# EAGLE board main_board (EAGLE 6.4)

Size 100 x 80 mm. Coordinates in mm from the lower left corner, seen from the top.
Outline: 0,0 100,0 100,80 0,80 0,0
Copper layers (1*16): Top 0.035mm / dielectric 1.5mm / Bottom 0.035mm
Design rules "default": minimum track width 10mil, minimum drill 24mil, track to track 8mil, track to pad 8mil, pad to pad 8mil, via to via 8mil, smd to smd 8mil, copper to edge 40mil, drill to drill 8mil, minimum pad ring 10mil, minimum via ring 8mil, stop-mask expansion 4mil, vias tented up to drill 0mil, thermal gap 10mil

## Footprints (pad centres in the part's own frame; a part is rotated, then mirrored left to right if it is on the bottom)
C0603K = smd 1.05 x 1.08: 1 -0.875,0; 2 0.875,0
C1206K = smd 1.5 x 2: 1 -1.5,0; 2 1.5,0
E3,5-8 = drill 0.813 pad 1.6: + -1.778,0 | drill 0.813 pad 1.6 octagon: - 1.778,0
SOD123 = smd 1.4 x 1.4: A 1.9,0; C -1.9,0
R1206 = smd 1.6 x 1.803: 1 -1.422,0; 2 1.422,0
DIL40_0.9 = drill 1 pad 1.397 octagon: 1 -22.86,-11.43; 2 -20.32,-11.43; 3 -17.78,-11.43; 4 -15.24,-11.43; 5 -12.7,-11.43; 6 -10.16,-11.43; 7 -7.62,-11.43; 8 -5.08,-11.43; 9 -2.54,-11.43; 10 0,-11.43; 11 2.54,-11.43; 12 5.08,-11.43; 13 7.62,-11.43; 14 10.16,-11.43; 15 12.7,-11.43; 16 15.24,-11.43; 17 17.78,-11.43; 18 20.32,-11.43; 19 22.86,-11.43; 20 25.4,-11.43; 21 25.4,11.43; 22 22.86,11.43; 23 20.32,11.43; 24 17.78,11.43; 25 15.24,11.43; 26 12.7,11.43; 27 10.16,11.43; 28 7.62,11.43; 29 5.08,11.43; 30 2.54,11.43; 31 0,11.43; 32 -2.54,11.43; 33 -5.08,11.43; 34 -7.62,11.43; 35 -10.16,11.43; 36 -12.7,11.43; 37 -15.24,11.43; 38 -17.78,11.43; 39 -20.32,11.43; 40 -22.86,11.43
WAGO_2060-402 = smd 6 x 2: 1 -4,2; 2 -4,-2 | smd 3.5 x 2: B-1 5.25,2; B-2 5.25,-2
SCREWTERMINAL-3.5MM-2 = drill 1.2 pad 2.032 square: 1 0,0 | drill 1.2 pad 2.032: 2 3.5,0
CHIP-LED0603 = smd 0.8 x 0.8: A 0,-0.75; C 0,0.75
R0603 = smd 1 x 1.1: 1 -0.85,0; 2 0.85,0
SOIC-16 = smd 1.549 x 0.61: 1 -2.692,4.445; 2 -2.692,3.175; 3 -2.692,1.905; 4 -2.692,0.635; 5 -2.692,-0.635; 6 -2.692,-1.905; 7 -2.692,-3.175; 8 -2.692,-4.445; 9 2.692,-4.445; 10 2.692,-3.175; 11 2.692,-1.905; 12 2.692,-0.635; 13 2.692,0.635; 14 2.692,1.905; 15 2.692,3.175; 16 2.692,4.445
HSOP = smd 0.7 x 1.4: 1 -5.715,-6.731; 2 -4.445,-6.731; 3 -3.175,-6.731; 4 -1.905,-6.731; 5 -0.635,-6.731; 6 0.635,-6.731; 7 1.905,-6.731; 8 3.175,-6.731; 9 4.445,-6.731; 10 5.715,-6.731; 11 5.715,6.731; 12 4.445,6.731; 13 3.175,6.731; 14 1.905,6.731; 15 0.635,6.731; 16 -0.635,6.731; 17 -1.905,6.731; 18 -3.175,6.731; 19 -4.445,6.731; 20 -5.715,6.731 | smd 2.15 x 2.8: SL1 -7.239,0; SL2 7.239,0
SO08 = smd 0.61 x 2.21: 1 -1.905,-2.616; 2 -0.635,-2.616; 3 0.635,-2.616; 4 1.905,-2.616; 5 1.905,2.616; 6 0.635,2.616; 7 -0.635,2.616; 8 -1.905,2.616
SOT23-5 = smd 0.55 x 1.2: 1 -0.95,-1.3; 2 0,-1.3; 3 0.95,-1.3; 4 0.95,1.3; 5 -0.95,1.3
SOP65P640X120-24N = smd 1.473 x 0.356: 1 -2.921,3.581; 2 -2.921,2.921; 3 -2.921,2.286; 4 -2.921,1.626; 5 -2.921,0.965; 6 -2.921,0.33; 7 -2.921,-0.33; 8 -2.921,-0.965; 9 -2.921,-1.626; 10 -2.921,-2.286; 11 -2.921,-2.921; 12 -2.921,-3.581; 13 2.921,-3.581; 14 2.921,-2.921; 15 2.921,-2.286; 16 2.921,-1.626; 17 2.921,-0.965; 18 2.921,-0.33; 19 2.921,0.33; 20 2.921,0.965; 21 2.921,1.626; 22 2.921,2.286; 23 2.921,2.921; 24 2.921,3.581
MICROMATCH-4 = drill 0.813: 1 1.905,1.27; 2 0.635,-1.27; 3 -0.635,1.27; 4 -1.905,-1.27

## Placement (x,y rotation side)
C3  100nF  [C0603K]  -25.4,102.87 0 top  (outside the outline)
C5  33nF  [C0603K]  -68.58,102.87 0 top  (outside the outline)
C6  10uF  [C1206K]  -87.63,90.17 0 top  (outside the outline)
C7  470uF-16V  [E3,5-8]  94.34,65.8 0 top
C8  1uF  [C0603K]  -92.71,102.87 0 top  (outside the outline)
C10  100nF  [C0603K]  -31.75,102.87 0 top  (outside the outline)
C11  100nF  [C0603K]  -38.1,102.87 0 top  (outside the outline)
C12  100nF  [C0603K]  -44.45,102.87 0 top  (outside the outline)
C13  100nF  [C0603K]  -50.8,102.87 0 top  (outside the outline)
C14  10uF  [C1206K]  -92.71,90.17 0 top  (outside the outline)
C15  33nF  [C0603K]  -73.66,102.87 0 top  (outside the outline)
C16  100nF  [C0603K]  -57.15,102.87 0 top  (outside the outline)
C17  100nF  [C0603K]  -63.5,102.87 0 top  (outside the outline)
C20  33nF  [C0603K]  -78.74,102.87 0 top  (outside the outline)
C25  33nF  [C0603K]  -83.82,102.87 0 top  (outside the outline)
C30  33nF  [C0603K]  -88.9,102.87 0 top  (outside the outline)
D1  12V  [SOD123]  -82.55,91.44 0 top  (outside the outline)
F3  FUSE_5A  [R1206]  -73.66,91.44 0 top  (outside the outline)
IC1  MBED_MICROCONTROLLER  [DIL40_0.9]  74.36,40.47 180 top
J1  2060-402  [WAGO_2060-402]  67,16.2 0 top
JP1  MOTOR  [SCREWTERMINAL-3.5MM-2]  3.84,14.45 270 top
JP2  PWR  [SCREWTERMINAL-3.5MM-2]  79.56,75.74 0 top
JP3  MOTOR  [SCREWTERMINAL-3.5MM-2]  62.04,77.93 270 top
JP4  MOTOR  [SCREWTERMINAL-3.5MM-2]  4.14,69.82 270 top
JP5  MOTOR  [SCREWTERMINAL-3.5MM-2]  4.74,41.01 270 top
JP6  MOTOR  [SCREWTERMINAL-3.5MM-2]  34.6,4.24 0 top
LED4  [CHIP-LED0603]  -77.47,88.9 0 top  (outside the outline)
R6  1k  [R0603]  -15.24,102.87 0 top  (outside the outline)
R10  10k  [R0603]  -21.59,97.79 0 top  (outside the outline)
R11  10k  [R0603]  -92.71,97.79 0 top  (outside the outline)
R12  10k  [R0603]  -26.67,97.79 0 top  (outside the outline)
R13  100k  [R0603]  -16.51,97.79 0 top  (outside the outline)
R18  10k  [R0603]  -31.75,97.79 0 top  (outside the outline)
R19  10k  [R0603]  -36.83,97.79 0 top  (outside the outline)
R20  10k  [R0603]  -41.91,97.79 0 top  (outside the outline)
R21  10k  [R0603]  -46.99,97.79 0 top  (outside the outline)
R22  10k  [R0603]  -52.07,97.79 0 top  (outside the outline)
R23  10k  [R0603]  -57.15,97.79 0 top  (outside the outline)
R24  10k  [R0603]  -62.23,97.79 0 top  (outside the outline)
R25  10k  [R0603]  -67.31,97.79 0 top  (outside the outline)
R26  10k  [R0603]  -72.39,97.79 0 top  (outside the outline)
R27  10k  [R0603]  -77.47,97.79 0 top  (outside the outline)
R28  10k  [R0603]  -82.55,97.79 0 top  (outside the outline)
R29  10k  [R0603]  -87.63,97.79 0 top  (outside the outline)
U2  SI8460AA-B-IS1  [SOIC-16]  38.54,54.48 90 top
U3  MC33887-HSOP  [HSOP]  19.54,15.02 0 bottom
U4  NFET-SOIC8  [SO08]  92.07,74 0 top
U5  LDO  [SOT23-5]  -19.05,102.87 0 top  (outside the outline)
U6  SI8460AA-B-IS1  [SOIC-16]  37.96,41.04 180 top
U7  MC33887-HSOP  [HSOP]  47.43,68.41 0 bottom
U8  SI8460AA-B-IS1  [SOIC-16]  38.61,27.83 270 top
U9  MC33887-HSOP  [HSOP]  21.02,68.01 0 bottom
U11  MC33887-HSOP  [HSOP]  20.81,38.11 0 bottom
U13  MC33887-HSOP  [HSOP]  47.03,13.66 0 bottom
U14  PCF8575PWE4  [SOP65P640X120-24N]  66.49,40.76 0 top
X3  ENC1  [MICROMATCH-4]  78.15,62.5 0 top
X4  ENC2  [MICROMATCH-4]  65.86,62.6 0 top
X6  ENC3  [MICROMATCH-4]  6.07,54 0 top
X7  ENC4  [MICROMATCH-4]  77.98,6.3 0 top
X8  ENC5  [MICROMATCH-4]  66.79,6.4 0 top

## Library data of the parts
C3 C5-C8 C10-C17 C20 C25 C30 F3 R6 R10-R13 R18-R29 = rcl
D1 = diode
IC1 = mbed-microcontroller
J1 = Wago-2060-402; MPN: 2060-402/998-404; OC_FARNELL: 2102477; OC_NEWARK: 62T0379; PACKAGE: SMD-R/A; SUPPLIER: WAGO
JP1-JP6 U4 U5 = SparkFun
LED4 = led
U2 U6 U8 = si8460
U3 U7 U9 U11 U13 = mc33887
U14 = pcf8575; MPN: PCF8575PWE4; OC_FARNELL: 1053546; OC_NEWARK: 97K6983; PACKAGE: TSSOP-24; SUPPLIER: Texas Instruments
X3 X4 X6-X8 = con-amp-micromatch; MPN: 7-215464-4; OC_FARNELL: 3784629; OC_NEWARK: 19R8124

## Nets
+3V3: IC1.40 U14.24
+5V: C6.1 C11.1 C13.1 C17.1 R6.2 R11.2 R12.2 R19.2 R20.2 R22.2 R23.2 R25.2 R26.2 R28.2 R29.2 U2.16 U5.5 U6.16 U8.16
+12V: C8.1 F3.1 U3.4 U3.5 U3.16 U5.1 U5.3 U7.4 U7.5 U7.16 U9.4 U9.5 U9.16 U11.4 U11.5 U11.16 U13.4 U13.5 U13.16
DIR1_1: U2.3 U14.4
DIR1_1_D: U2.14 U3.3
DIR1_2: U2.4 U14.5
DIR1_2_D: U2.13 U3.19
DIR2_1: U2.6 U14.6
DIR2_1_D: U2.11 U7.3
DIR2_2: U2.7 U14.7
DIR2_2_D: U2.10 U7.19
DIR3_1: U6.3 U14.8
DIR3_1_D: U6.14 U9.3
DIR3_2: U6.4 U14.9
DIR3_2_D: U6.13 U9.19
DIR4_1: U6.6 U14.10
DIR4_1_D: U6.11 U11.3
DIR4_2: U6.7 U14.11
DIR4_2_D: U6.10 U11.19
DIR5_1: U8.3 U14.13
DIR5_1_D: U8.14 U13.3
DIR5_2: U8.4 U14.14
DIR5_2_D: U8.13 U13.19
ENC1A: IC1.8 X3.3
ENC1B: IC1.11 X3.4
ENC2A: IC1.12 X4.3
ENC2B: IC1.15 X4.4
ENC3A: IC1.16 X6.3
ENC3B: IC1.17 X6.4
ENC4A: IC1.18 X7.3
ENC4B: IC1.26 X7.4
ENC5A: IC1.27 X8.3
ENC5B: IC1.28 X8.4
EXTEND_SCL: IC1.10 U14.22
EXTEND_SDA: IC1.9 U14.23
FAUL1T_D: R12.1 U3.2
FAULT1_D: R20.1 U7.2
FAULT3_D: R23.1 U9.2
FAULT4_D: R26.1 U11.2
FAULT5_D: R29.1 U13.2
GND: C10.2 C12.2 C16.2 IC1.1 U2.8 U6.8 U8.8 U14.2 U14.3 U14.12 U14.21 X3.1 X4.1 X6.1 X7.1 X8.1
GNDA: C3.2 C5.2 C6.2 C7.- C8.2 C11.2 C13.2 C14.2 C15.2 C17.2 C20.2 C25.2 C30.2 D1.A LED4.C R10.1 R18.1 R21.1 R24.1 R27.1 U2.9 U3.1 U3.9 U3.10 U3.11 U3.12 U3.SL1 U3.SL2 U4.1 U4.2 U4.3 U5.2 U6.9 U7.1 U7.9 U7.10 U7.11 U7.12 U7.SL1 U7.SL2 U8.9 U9.1 U9.9 U9.10 U9.11 U9.12 U9.SL1 U9.SL2 U11.1 U11.9 U11.10 U11.11 U11.12 U11.SL1 U11.SL2 U13.1 U13.9 U13.10 U13.11 U13.12 U13.SL1 U13.SL2
N$11: C3.1 U5.4
N$13: LED4.A R6.1
N$15: C5.1 U3.17
N$17: R11.1 U3.20
N$18: R10.2 U3.18
N$20: D1.C R13.1 U4.4
N$21: JP2.1 U4.5 U4.6 U4.7 U4.8
N$23: JP1.2 U3.6 U3.7
N$25: JP1.1 U3.14 U3.15
N$30: C7.+ C14.1 F3.2 JP2.2 R13.2
N$31: C15.1 U7.17
N$32: R19.1 U7.20
N$33: R18.2 U7.18
N$34: JP3.2 U7.6 U7.7
N$35: JP3.1 U7.14 U7.15
N$36: C20.1 U9.17
N$37: R22.1 U9.20
N$38: R21.2 U9.18
N$39: JP4.2 U9.6 U9.7
N$40: JP4.1 U9.14 U9.15
N$41: C25.1 U11.17
N$42: R25.1 U11.20
N$43: R24.2 U11.18
N$44: JP5.2 U11.6 U11.7
N$45: JP5.1 U11.14 U11.15
N$46: C30.1 U13.17
N$47: R28.1 U13.20
N$48: R27.2 U13.18
N$49: JP6.2 U13.6 U13.7
N$50: JP6.1 U13.14 U13.15
PWM1: IC1.21 U2.2
PWM1_D: U2.15 U3.13
PWM2: IC1.22 U2.5
PWM2_D: U2.12 U7.13
PWM3: IC1.23 U6.2
PWM3_D: U6.15 U9.13
PWM4: IC1.24 U6.5
PWM4_D: U6.12 U11.13
PWM5: IC1.25 U8.2
PWM5_D: U8.15 U13.13
VCC: C10.1 C12.1 C16.1 IC1.2 U2.1 U6.1 U8.1 X3.2 X4.2 X6.2 X7.2 X8.2

## Tracks (layer width: path | path; a pad name or v marks a point on that pad's centre or on a via)
+3V3  (1 unrouted)
+5V  (18 unrouted)
+12V  (18 unrouted)
DIR1_1  (1 unrouted)
DIR1_1_D  (1 unrouted)
DIR1_2  (1 unrouted)
DIR1_2_D  (1 unrouted)
DIR2_1  (1 unrouted)
DIR2_1_D  (1 unrouted)
DIR2_2  (1 unrouted)
DIR2_2_D  (1 unrouted)
DIR3_1  (1 unrouted)
DIR3_1_D  (1 unrouted)
DIR3_2  (1 unrouted)
DIR3_2_D  (1 unrouted)
DIR4_1  (1 unrouted)
DIR4_1_D  (1 unrouted)
DIR4_2  (1 unrouted)
DIR4_2_D  (1 unrouted)
DIR5_1  (1 unrouted)
DIR5_1_D  (1 unrouted)
DIR5_2  (1 unrouted)
DIR5_2_D  (1 unrouted)
ENC1A  (1 unrouted)
ENC1B  (1 unrouted)
ENC2A  (1 unrouted)
ENC2B  (1 unrouted)
ENC3A  (1 unrouted)
ENC3B  (1 unrouted)
ENC4A  (1 unrouted)
ENC4B  (1 unrouted)
ENC5A  (1 unrouted)
ENC5B  (1 unrouted)
EXTEND_SCL  (1 unrouted)
EXTEND_SDA  (1 unrouted)
FAUL1T_D  (1 unrouted)
FAULT1_D  (1 unrouted)
FAULT3_D  (1 unrouted)
FAULT4_D  (1 unrouted)
FAULT5_D  (1 unrouted)
GND  (15 unrouted)
GNDA  (61 unrouted)
N$11  (1 unrouted)
N$13  (1 unrouted)
N$15  (1 unrouted)
N$17  (1 unrouted)
N$18  (1 unrouted)
N$20  (2 unrouted)
N$21  (4 unrouted)
N$23  (2 unrouted)
N$25  (2 unrouted)
N$30  (4 unrouted)
N$31  (1 unrouted)
N$32  (1 unrouted)
N$33  (1 unrouted)
N$34  (2 unrouted)
N$35  (2 unrouted)
N$36  (1 unrouted)
N$37  (1 unrouted)
N$38  (1 unrouted)
N$39  (2 unrouted)
N$40  (2 unrouted)
N$41  (1 unrouted)
N$42  (1 unrouted)
N$43  (1 unrouted)
N$44  (2 unrouted)
N$45  (2 unrouted)
N$46  (1 unrouted)
N$47  (1 unrouted)
N$48  (1 unrouted)
N$49  (2 unrouted)
N$50  (2 unrouted)
PWM1  (1 unrouted)
PWM1_D  (1 unrouted)
PWM2  (1 unrouted)
PWM2_D  (1 unrouted)
PWM3  (1 unrouted)
PWM3_D  (1 unrouted)
PWM4  (1 unrouted)
PWM4_D  (1 unrouted)
PWM5  (1 unrouted)
PWM5_D  (1 unrouted)
VCC  (11 unrouted)